# Altium PCB WAN_Size.PcbDoc
Units mm, origin at the board's own origin, x right, y up, seen from the top; angles counter-clockwise.
Board outline 30.69 x 39.99 mm, 2 copper layers (Top Layer, Bottom Layer); 2 components, 8 nets, 16 pads, 0 vias.
Unrouted connection lines stored in the file: 3.
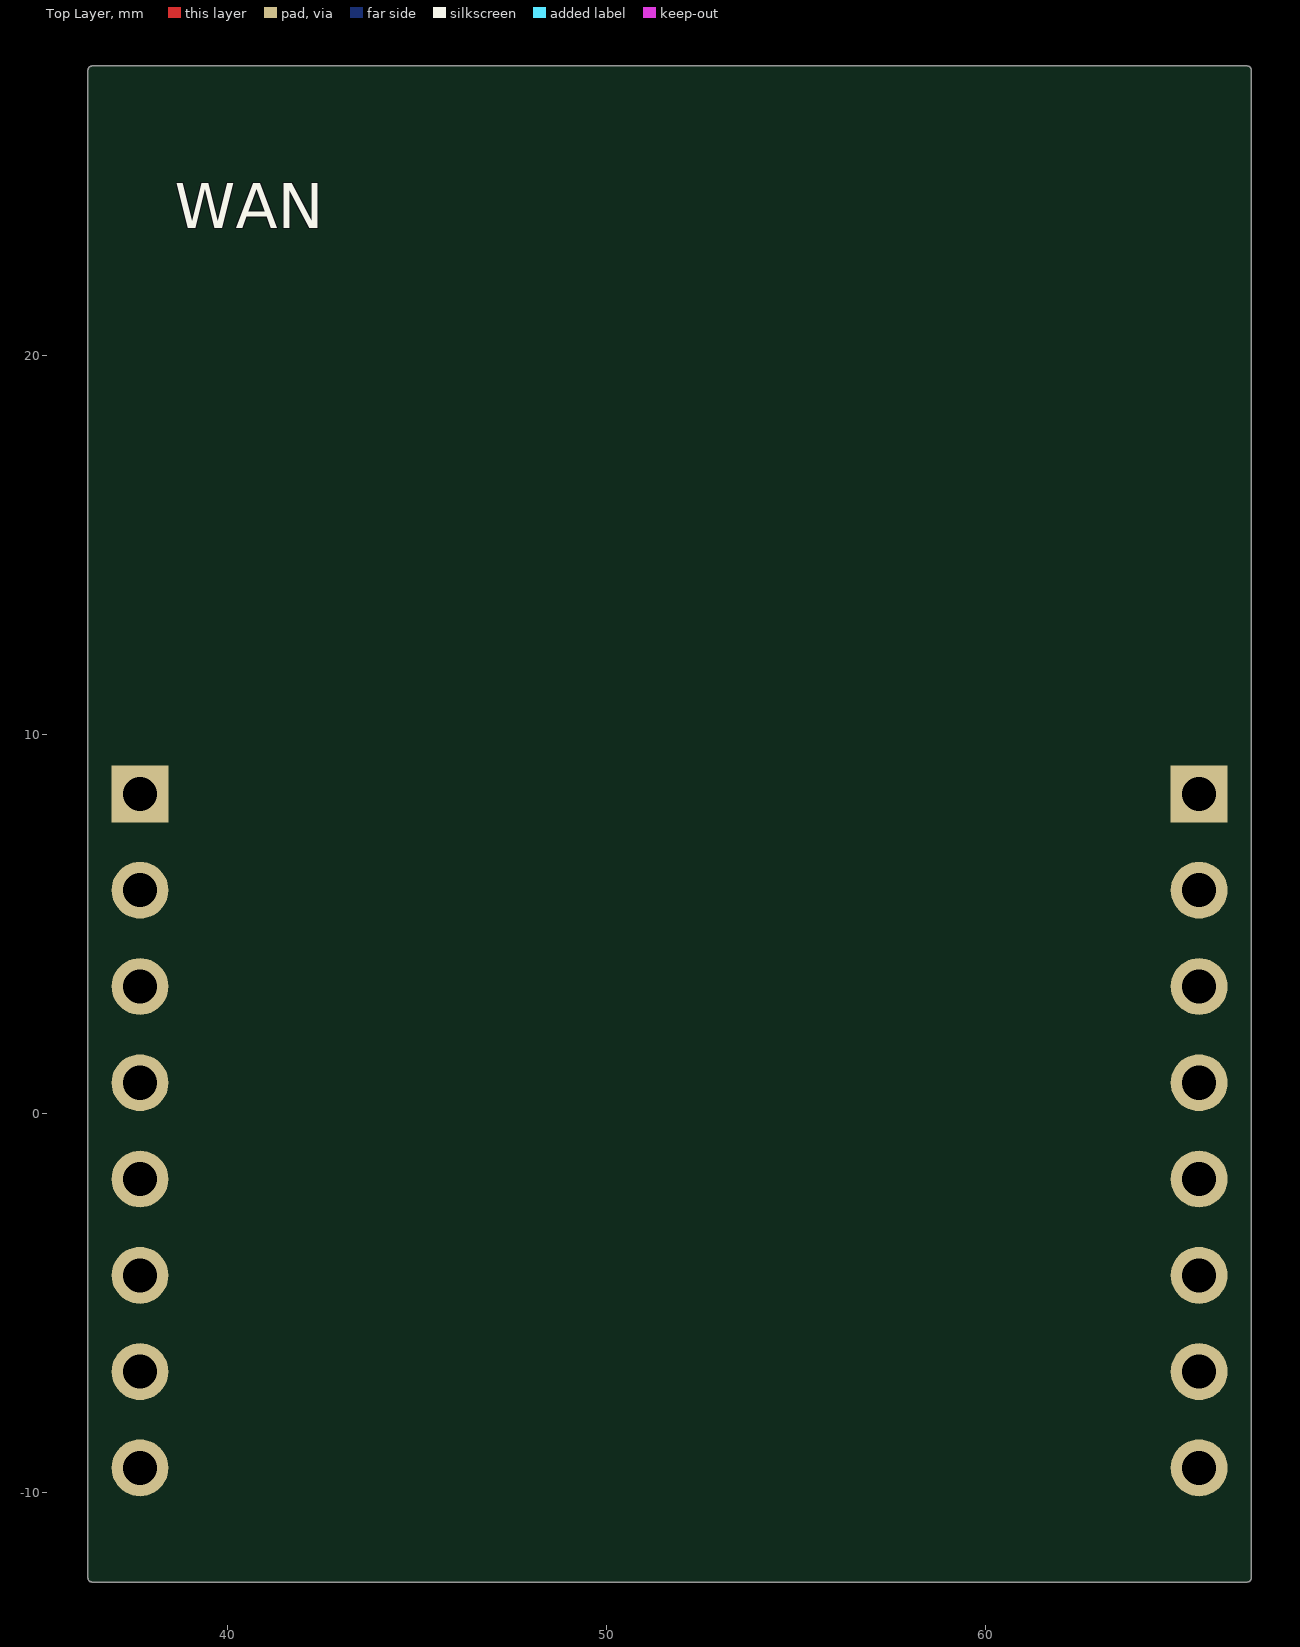
[diagram p0: Top Layer view]
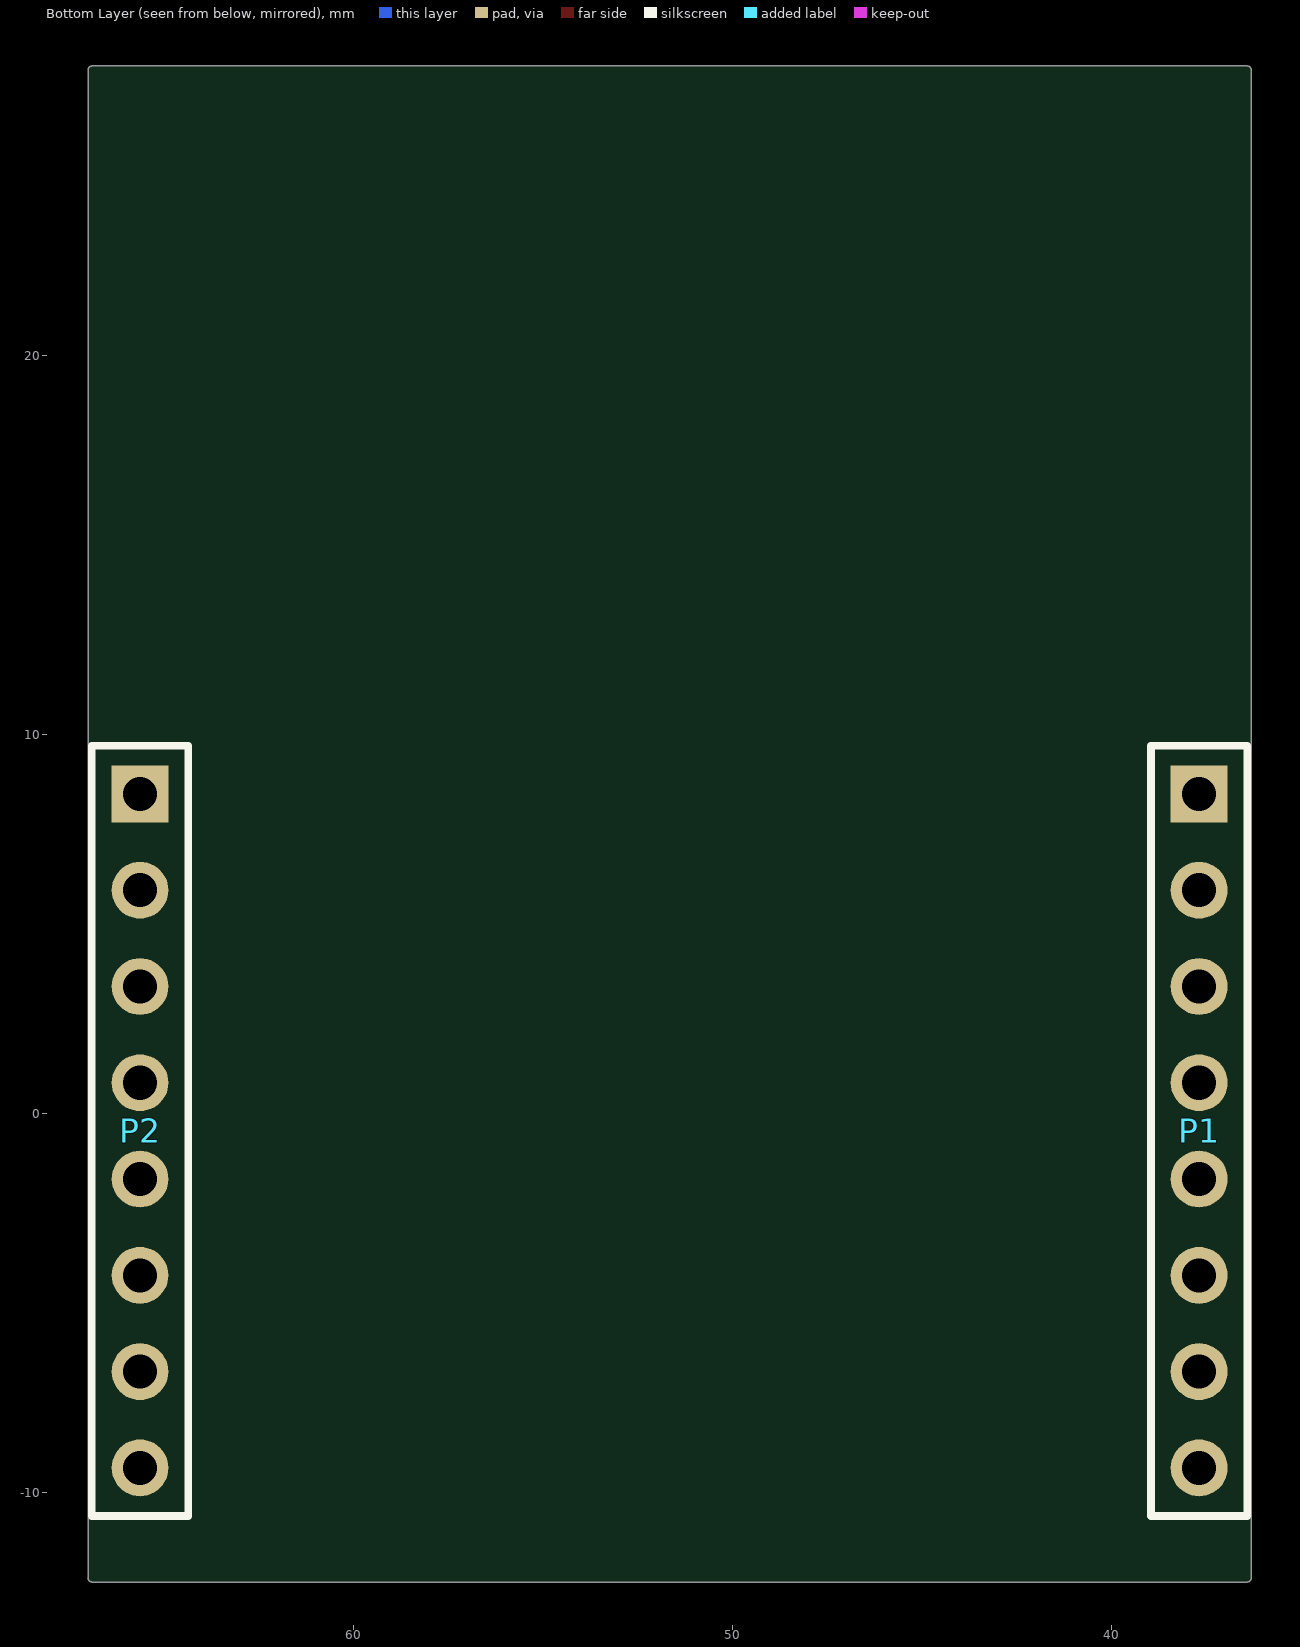
[diagram p1: Bottom Layer view, seen from below]

## Layer stack, top to bottom
Top Solder: solder mask 0.0102, Solder Resist, Dk 3.5
Top Layer: signal copper 0.0356
Dielectric 1: dielectric 0.32, FR-4, Dk 4.8
Bottom Layer: signal copper 0.0356
Bottom Solder: solder mask 0.0102, Solder Resist, Dk 3.5

## Board outline
36.335,-12.306 cw(c36.424,-12.255) 36.322,-12.255 36.322,27.534 cw(c36.424,27.534) 36.424,27.636 66.905,27.636 ccw(c66.905,27.534) 66.904,27.636 ccw(c66.904,27.534) 66.904,27.636 66.905,27.636 cw(c66.905,27.534) 67.007,27.534 67.007,-12.251 cw(c66.905,-12.256) 67.007,-12.256 cw(c66.905,-12.256) 66.905,-12.358 36.424,-12.358 cw(c36.424,-12.256)

## Design rules (kind name [scope] priority, off if disabled: settings)
Clearance Clearance_1 [InPolygon and InNet('GND')] p1: gap=0.305 ignorepadtopadclearanceinfootprint=FALSE
Clearance [All] p2: gap=0.152 ignorepadtopadclearanceinfootprint=FALSE
ComponentClearance [All] p1 off: gap=0.254 collisioncheckmode=3 verticalgap=0.254 showdistances=FALSE
PolygonConnect [All] p1: thpad.connectstyle=Relief thpad.reliefconductorwidth=0.254 thpad.reliefentries=4 thpad.polygonreliefangle="90 Angle" thpad.airgapwidth=0.254 smdpad.connectstyle=Relief smdpad.reliefconductorwidth=0.254 smdpad.reliefentries=4 smdpad.polygonreliefangle="90 Angle" smdpad.airgapwidth=0.254 via.connectstyle=Direct via.reliefconductorwidth=0.254 via.reliefentries=4 via.polygonreliefangle="90 Angle" via.airgapwidth=0.254
RoutingVias [All] p1: holewidth=0.711 width=1.27 viastyle="Through Hole" minholewidth=0.711 minwidth=1.27 maxholewidth=0.711 maxwidth=1.27
SolderMaskExpansion [All] p1: expansion=0.102
Width [All] p1: maxlimit=1.27 minlimit=0.152 preferedwidth=0.152 minimp=50.000000 maximp=50.000000 favimp=50.000000
29 further rules are at their usual default settings.

## Components (designator, comment, footprint, x,y, rotation, side; value= is the part's Value field where it differs from the comment)
P1 "Header 8" HDR1X8 37.694,8.433 r270 bottom
P2 "Header 8" HDR1X8 65.634,8.433 r270 bottom

## Footprints (in the part's own frame and the unit in brackets; to place one, negate y for a bottom-side part, rotate by r counter-clockwise, add the part's x,y. Pads: shape width x height; smd on the part's side, far side on the other; paste and mask are expansions set on the pad)
HDR1X8 [mm] "Connector; Header; 8 Position"
  rect 1.5x1.5 hole 0.9: 1(0,0)
  round 1.5 hole 0.9: 2(2.54,0) 3(5.08,0) 4(7.62,0) 5(10.16,0) 6(12.7,0) 7(15.24,0) 8(17.78,0)
  silkscreen extent -1.27,-1.27 19.05,1.27, body extent -1.24,-1.32 19.08,1.22, height 0.7

## Part data
P1 P2: "Header, 8-Pin", LatestRevisionDate=17-Jul-2002, LatestRevisionNote="Re-released for DXP Platform.", Publisher="Altium Limited"

## Nets (pads, with @x,y where several pads share a name; then routed paths per layer and width w, separated by ;. In a path a pad name is that pad's centre, name@x,y a point inside that pad or via, vN(x,y) a via of type N, cw(c..) or ccw(c..) an arc to the next point about the centre after c; other vN are vias at no path point)
ESP_RXD: P2.6
ESP_TXD: P2.5
GND: P1.6 P2.2 P2.4
NetM1_3: 
NetM1_16: 
NetM1_17: 
RESET: P2.8
VCC_3.3: P2.3
pads on no net: P1.1 P1.2 P1.3 P1.4 P1.5 P1.7 P1.8 P2.1 P2.7

## Silkscreen, mask and mechanical layers (free items; w line width, h text height)
Top Overlay:
  text "WAN" at 38.608,22.962 h2.03
Mechanical 1:
  lines w0.203: 66.904,-12.255 66.904,27.534 ; 36.424,-12.256 66.905,-12.256 ; 36.424,-12.255 66.905,-12.255 ; 36.424,-12.255 36.424,27.534 66.905,27.534 ; 36.424,-12.255 66.905,-12.255 ; 66.905,-12.255 66.905,27.534 ; 66.905,-12.255 66.905,27.534